# Altium PCB 0.96OLEDIIC_2024-05-03.pcbdoc
Units mm, origin at the board's own origin, x right, y up, seen from the top; angles counter-clockwise.
Board outline 54.36 x 53.71 mm, 2 copper layers (Top Layer, Bottom Layer); 1 components, 0 nets, 8 pads, 0 vias.
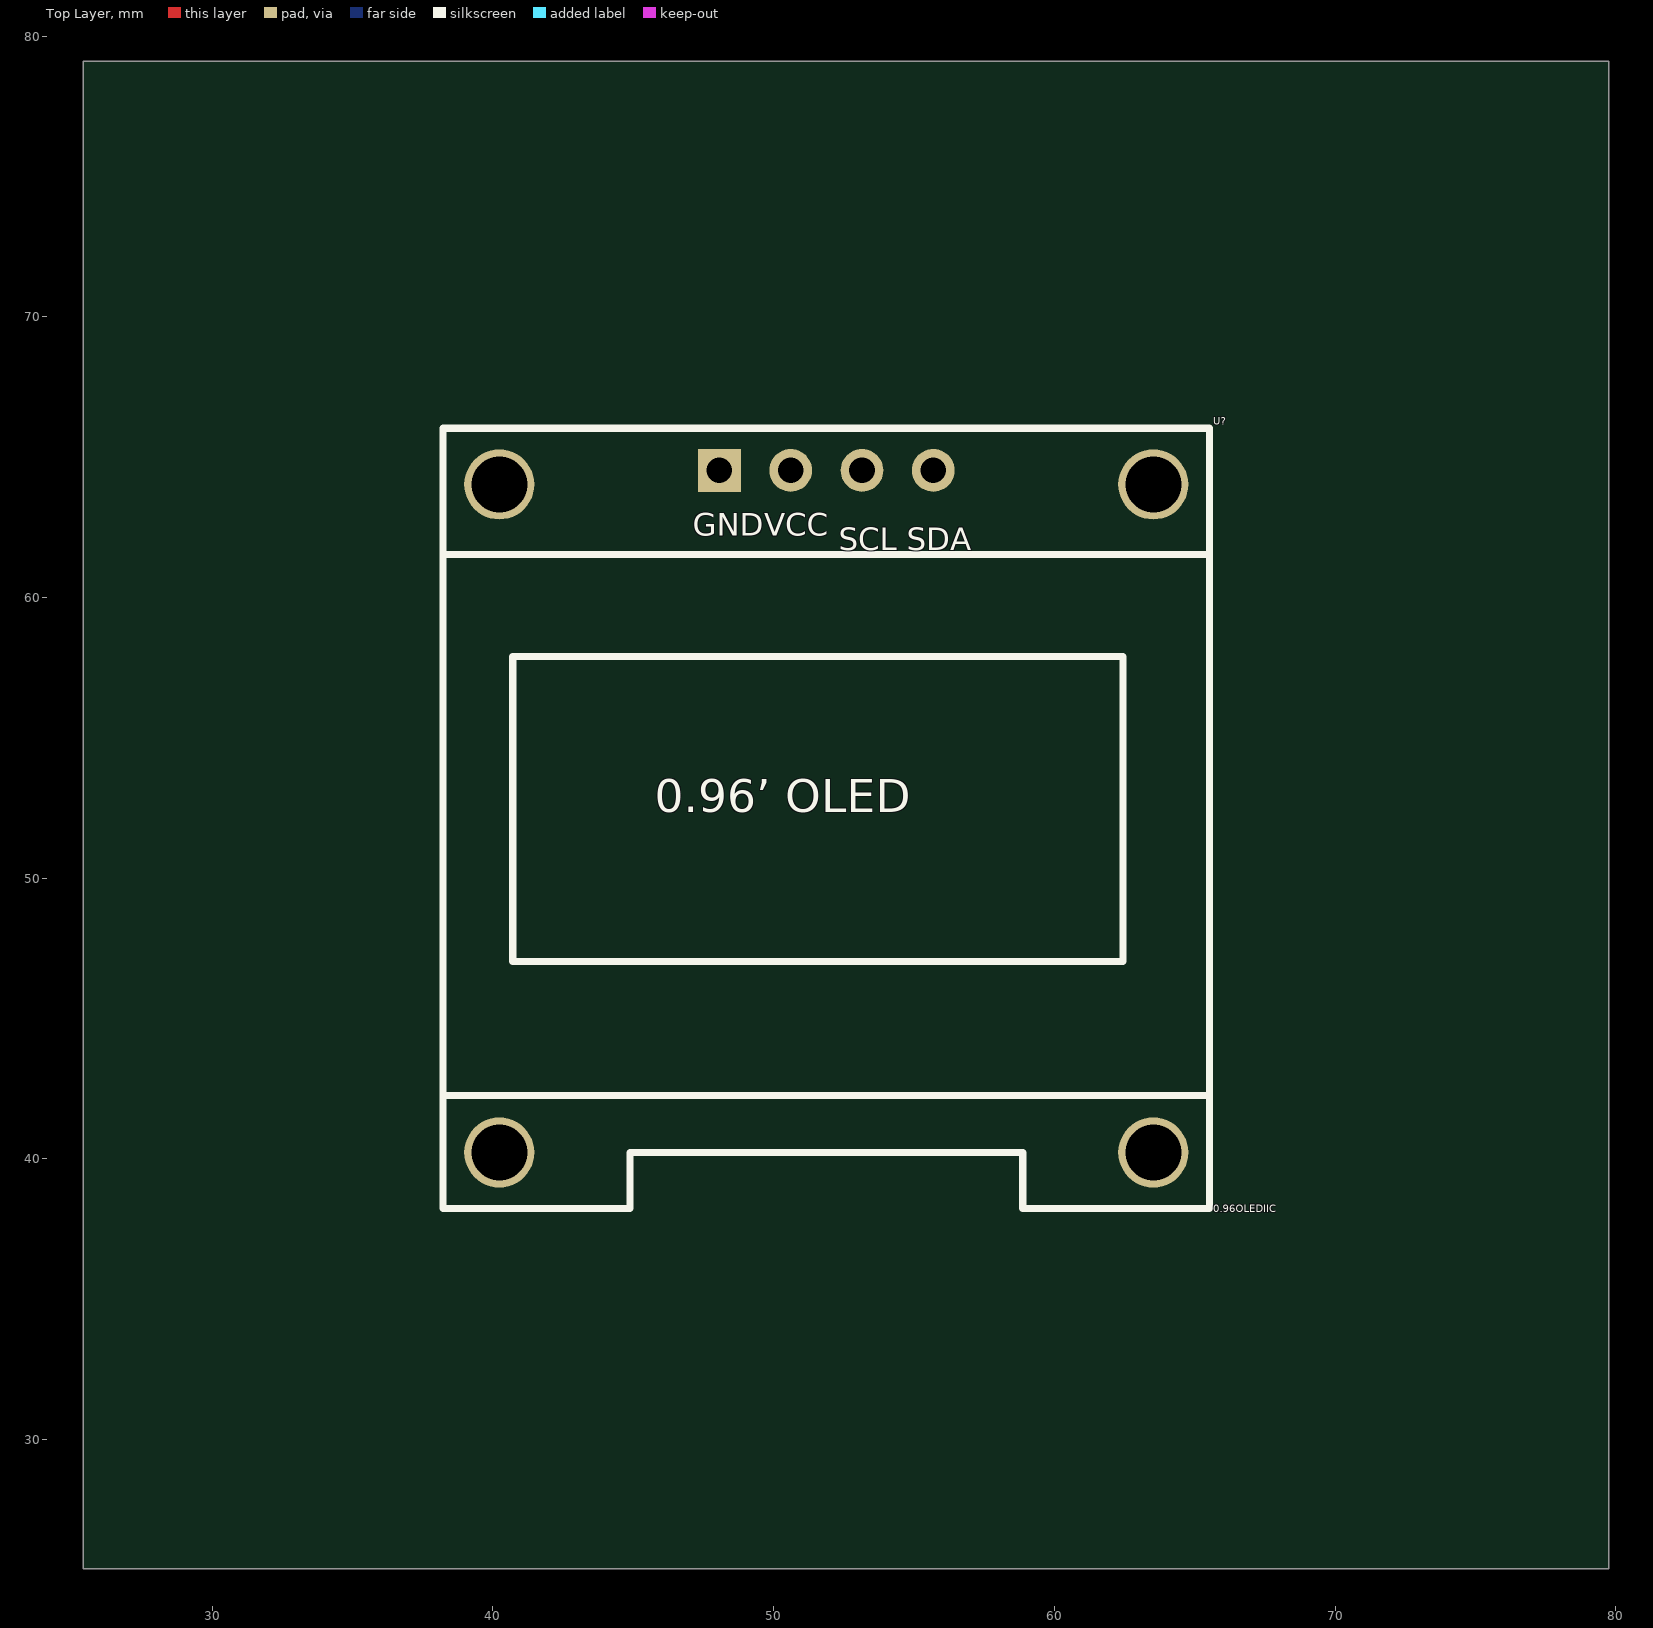
[diagram p0: Top Layer view]
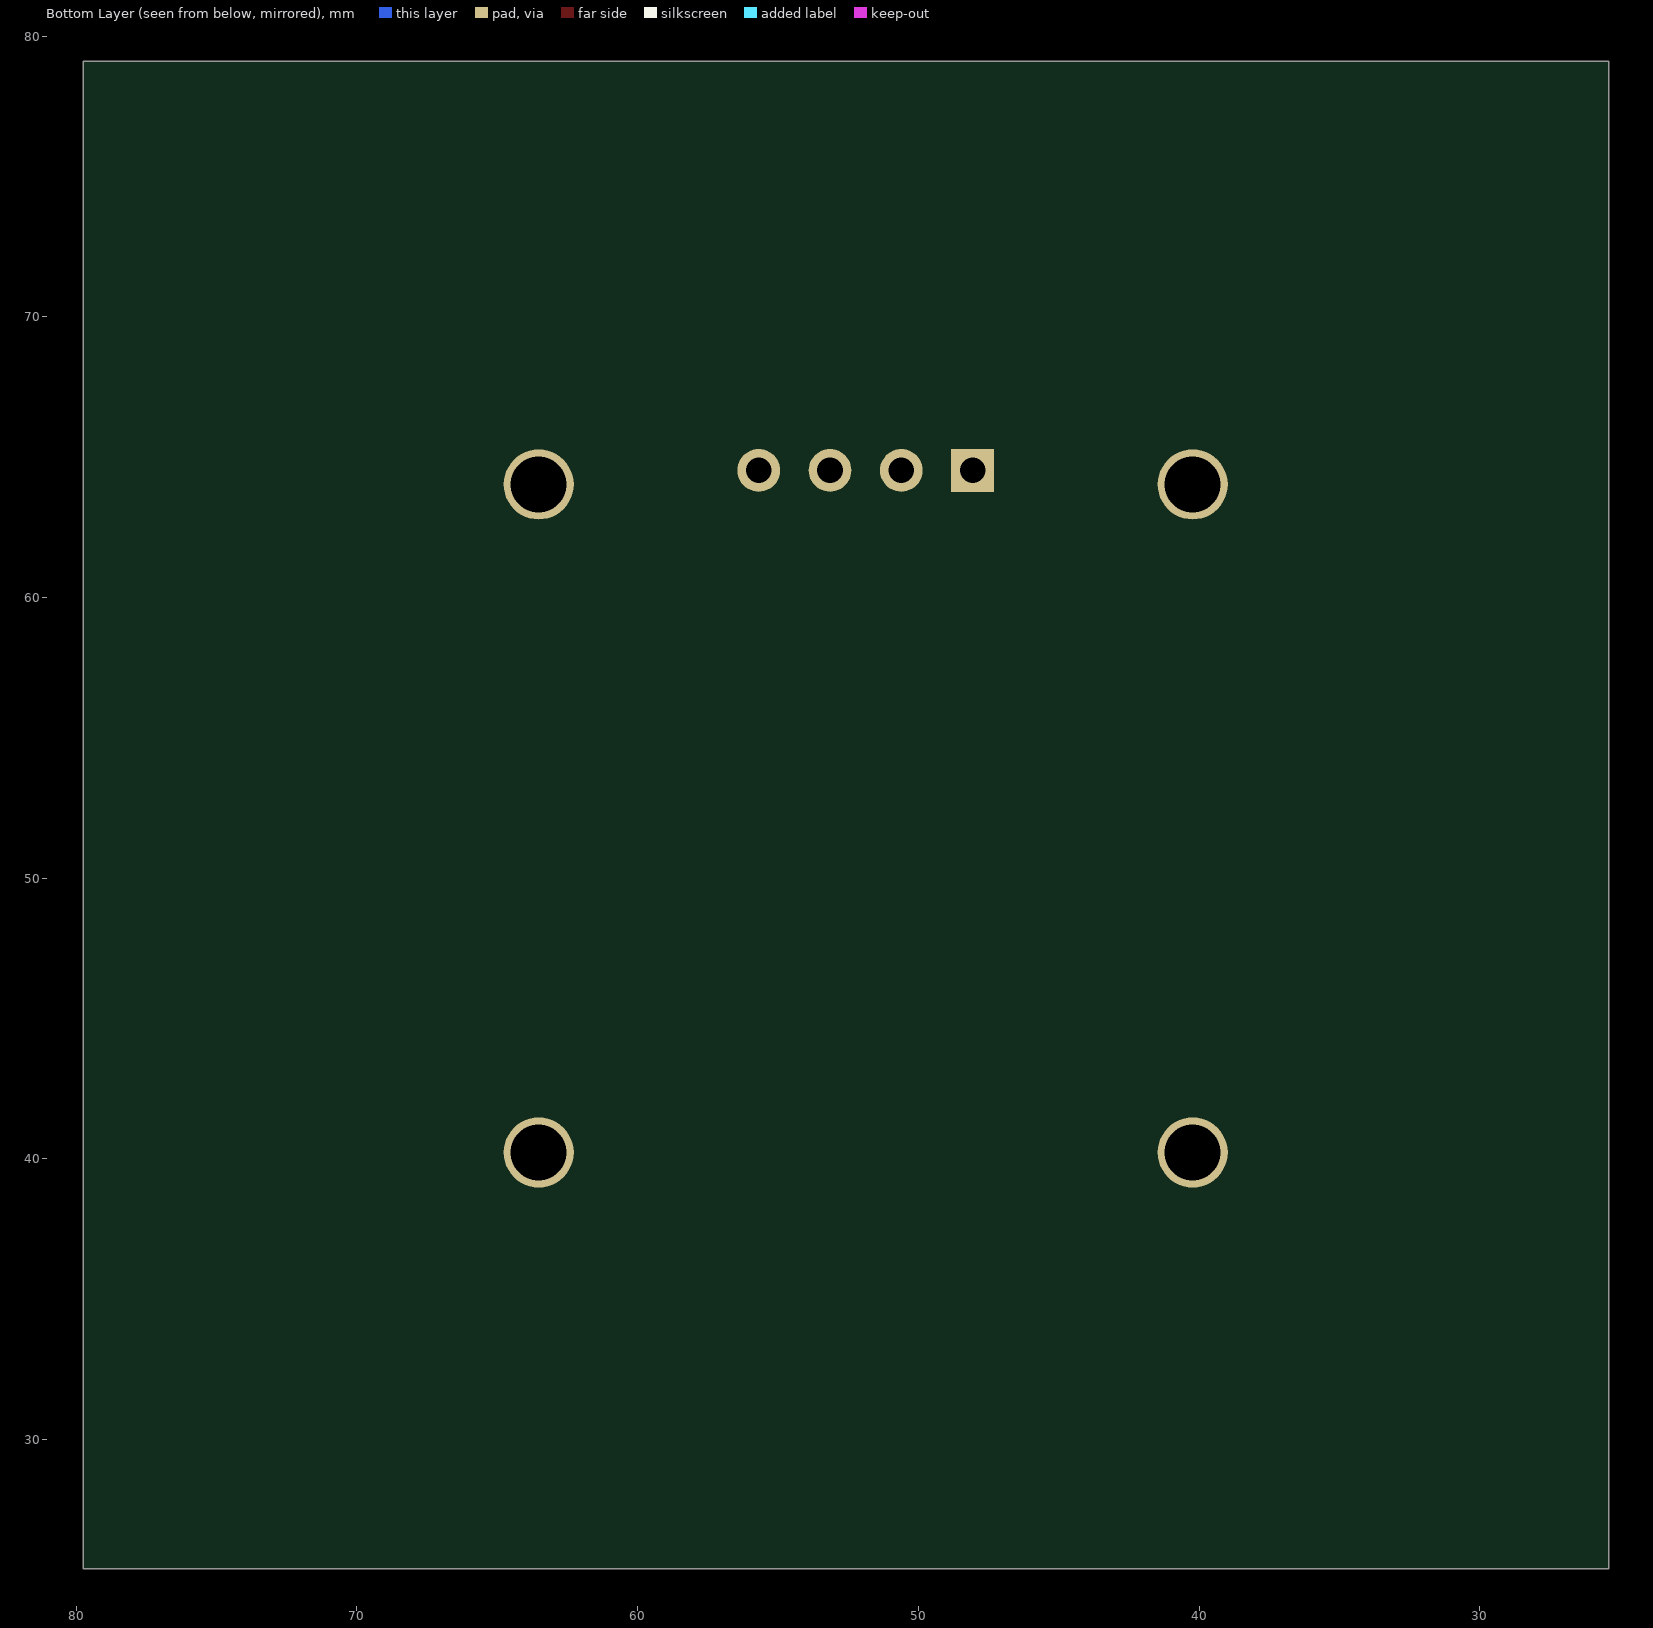
[diagram p1: Bottom Layer view, seen from below]

## Layer stack, top to bottom
Top Layer: signal copper (thickness not stored)
Dielectric: dielectric 0.32, FR-4, Dk 4.8
Bottom Layer: signal copper (thickness not stored)

## Board outline
79.756,25.4 25.4,25.4 25.4,79.108 79.756,79.108

## Components (designator, comment, footprint, x,y, rotation, side; value= is the part's Value field where it differs from the comment)
U? "0.96OLEDIIC" 0.96OLEDIIC 51.88,52.127 r0 top

## Footprints (in the part's own frame and the unit in brackets; to place one, negate y for a bottom-side part, rotate by r counter-clockwise, add the part's x,y. Pads: shape width x height; smd on the part's side, far side on the other; paste and mask are expansions set on the pad)
0.96OLEDIIC [mm]
  rect 1.524x1.524 hole 0.914 paste+0 mask+0.102: GND(-3.812,12.4)
  round 1.524 hole 0.914 paste+0 mask+0.102: SCL(1.268,12.4) SDA(3.808,12.4) VCC(-1.272,12.4)
  round 2.5 hole 2 paste+0 mask+0.5: ""(-11.653,-11.9) ""(-11.653,11.9) ""(11.648,-11.9) ""(11.648,11.9)
  silkscreen extent -13.65,-13.9 13.65,13.9

## Nets (pads, with @x,y where several pads share a name; then routed paths per layer and width w, separated by ;. In a path a pad name is that pad's centre, name@x,y a point inside that pad or via, vN(x,y) a via of type N, cw(c..) or ccw(c..) an arc to the next point about the centre after c; other vN are vias at no path point)
pads on no net: U?. U?.GND U?.SCL U?.SDA U?.VCC

## Silkscreen, mask and mechanical layers (free items; w line width, h text height)
Document:
  lines w0.003: 52.578,52.254 52.578,52.254

## Text inside footprints (layer, text, board x,y; h text height)
U?: Top Overlay "GND" at 47.117,62.198 h0.8; Top Overlay "VCC" at 49.657,62.198 h0.8; Top Overlay "SCL" at 52.324,61.69 h0.8; Top Overlay "SDA" at 54.737,61.69 h0.8; Top Overlay "0.96’ OLED" at 45.756,51.966 h2.03